# EAGLE board Light Sensors Gus (EAGLE 8.6.0)
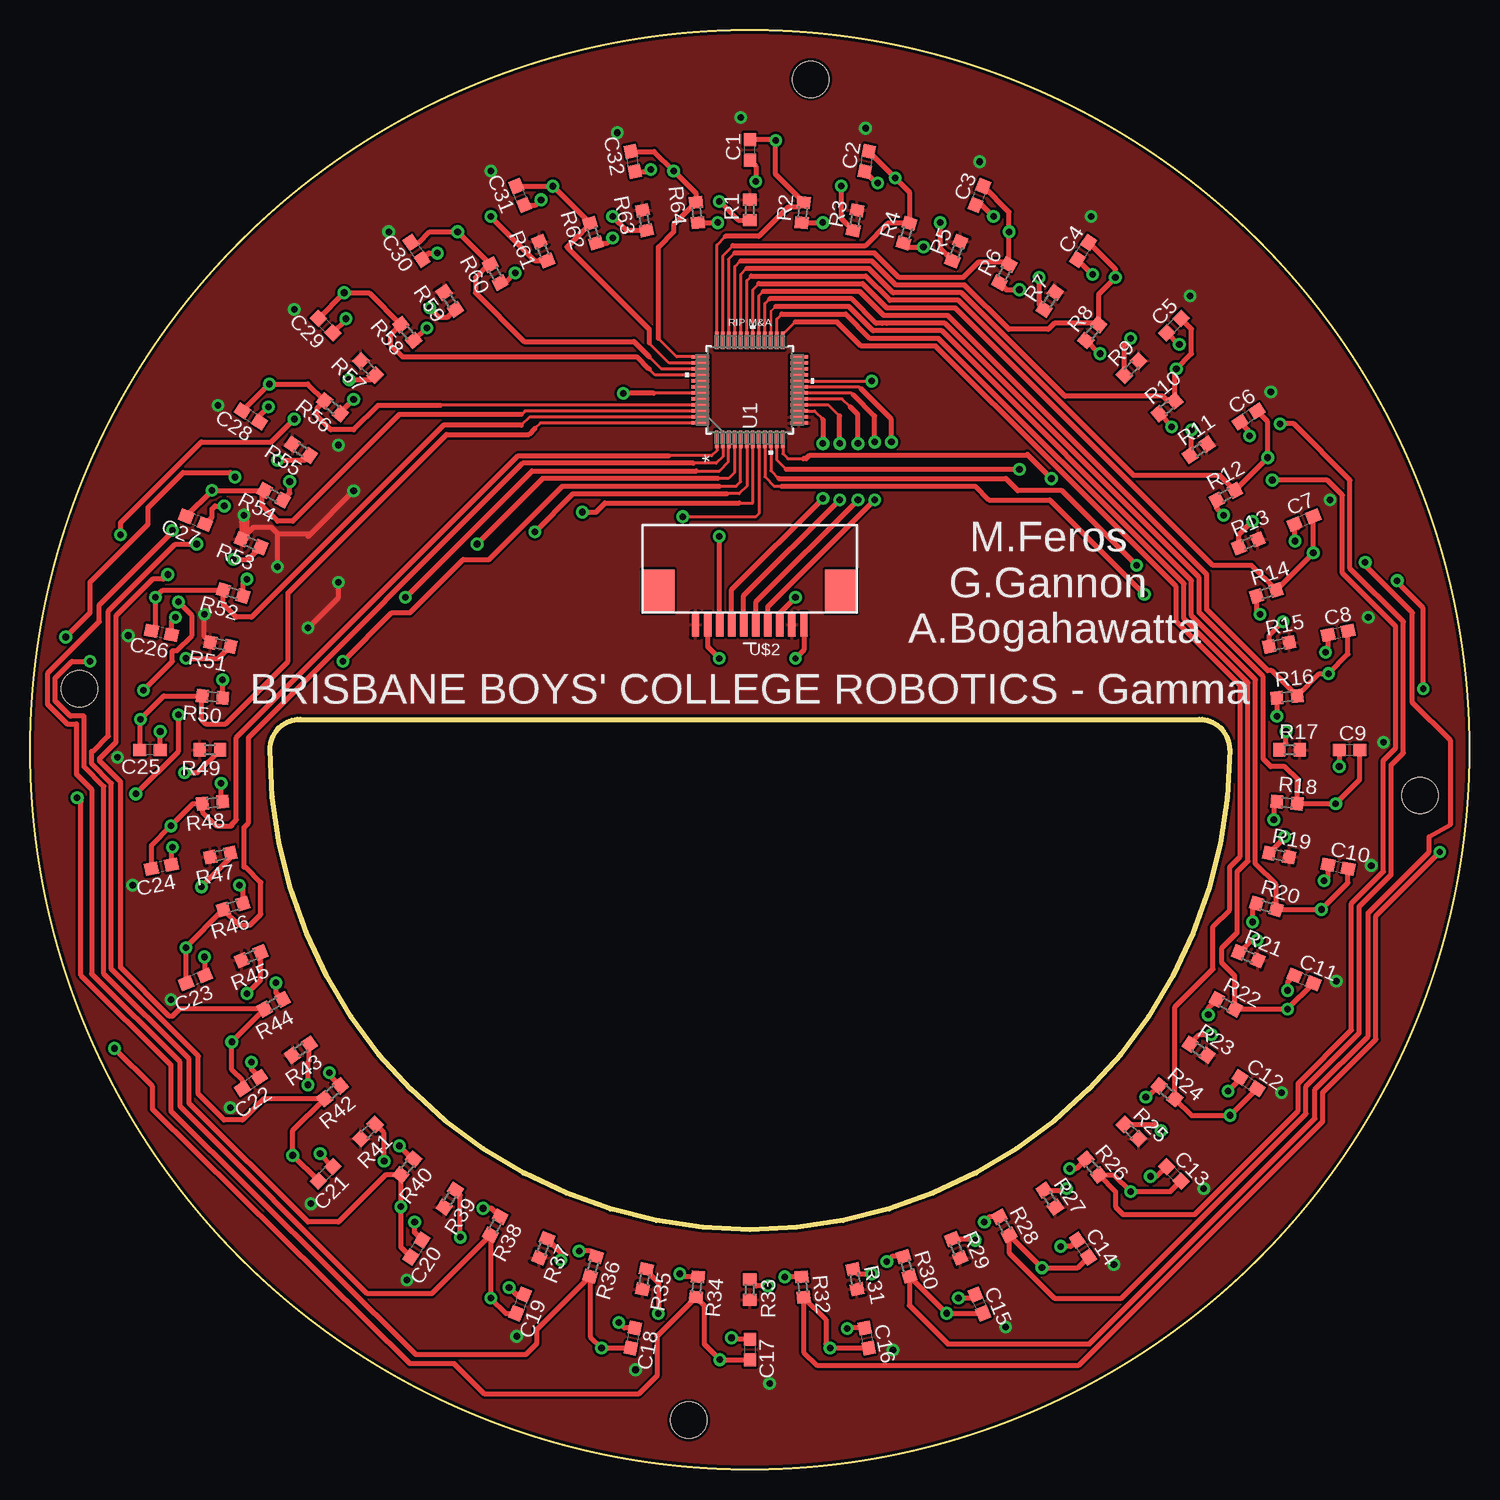
[diagram p0: board, top side]
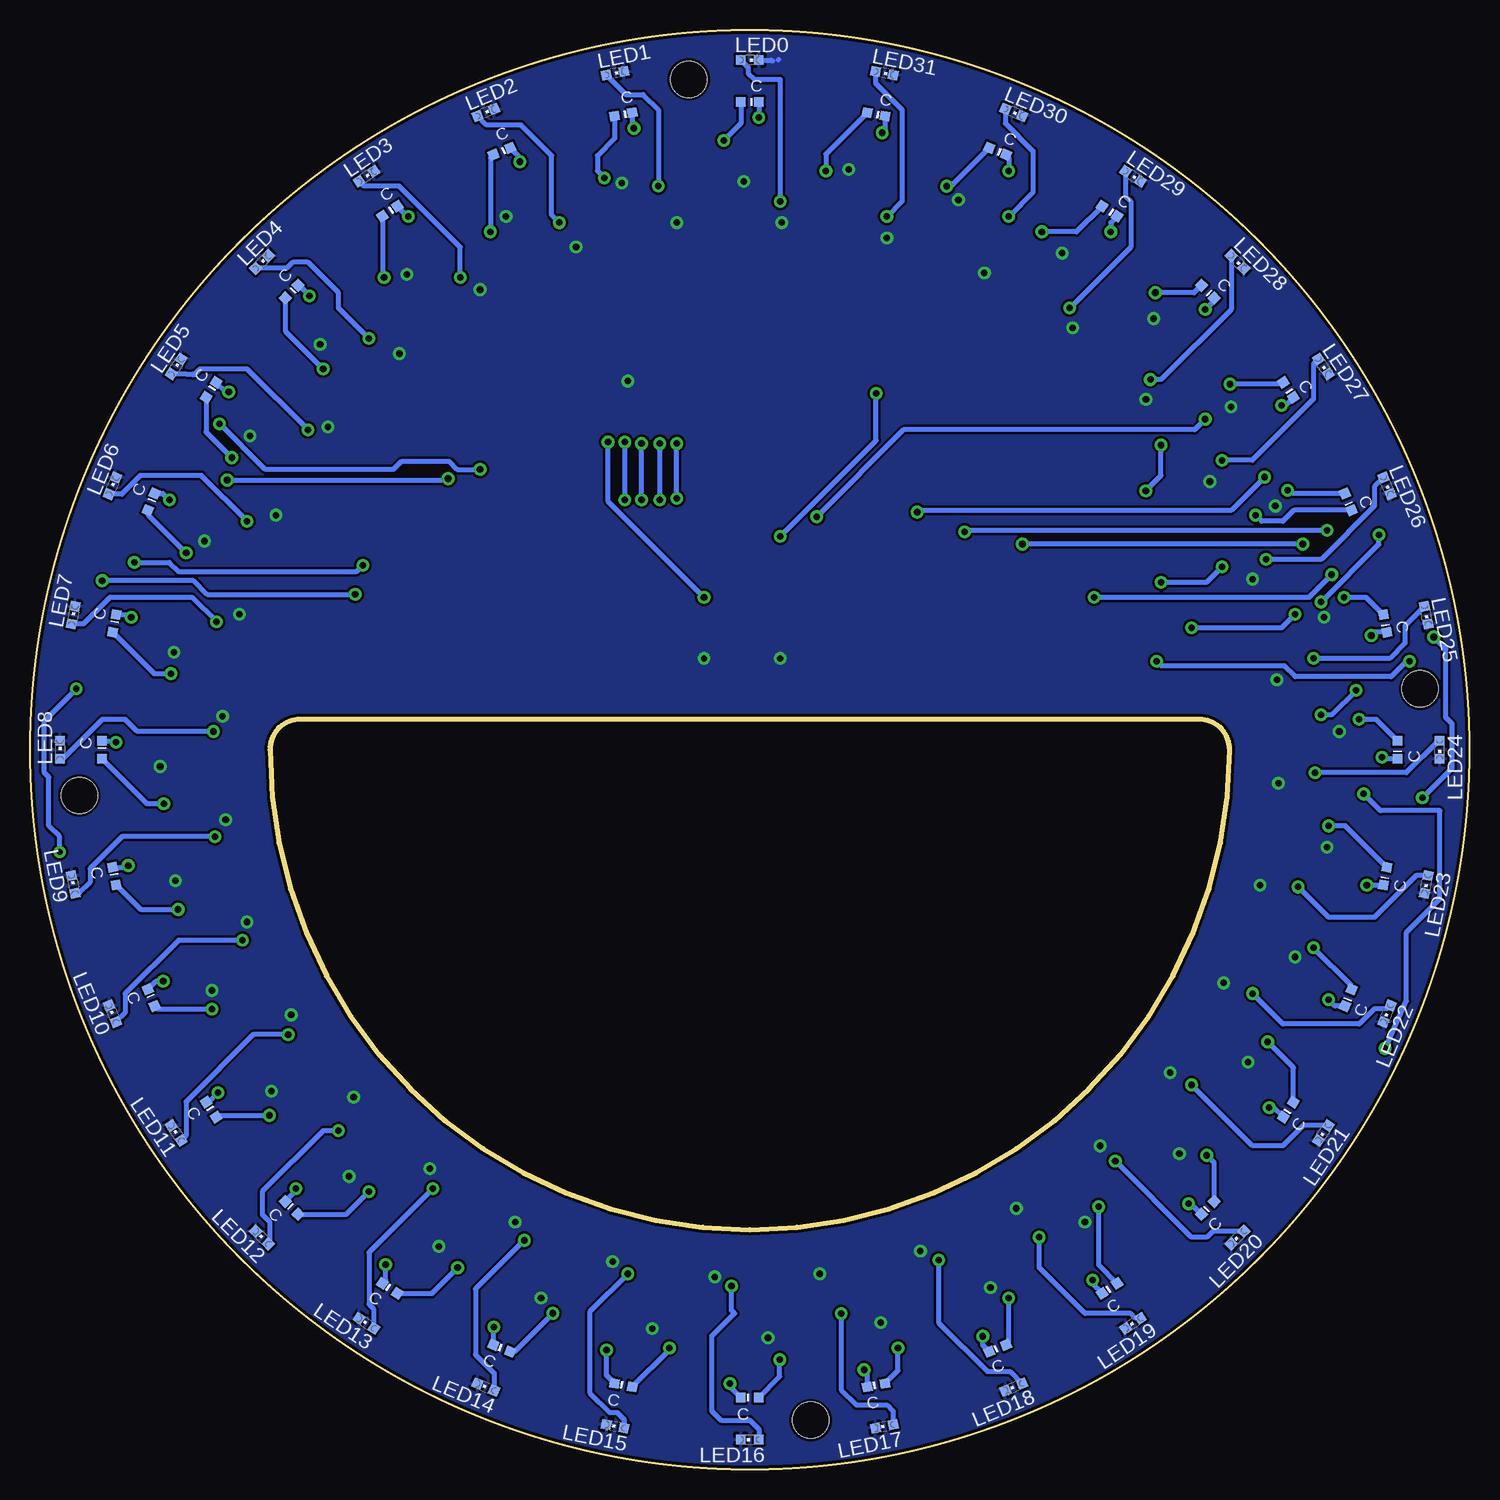
[diagram p1: board, bottom side, seen from below]

Size 120 x 120 mm. Coordinates in mm from the lower left corner, seen from the top.
Outline: 100,60 arc-180 20,60 arc-90 22.54,62.54 97.46,62.54 arc-90 100,60
Outline: circle at 60,60 radius 60
Copper layers (1*16): Top 0.035mm / dielectric 1.5mm / Bottom 0.035mm
Design rules "SparkFun": minimum track width 8mil, minimum drill 20mil, track to track 8mil, track to pad 8mil, pad to pad 8mil, via to via 8mil, smd to smd 8mil, copper to edge 10mil, drill to drill 8mil, minimum pad ring 12mil, minimum via ring 10mil, stop-mask expansion 4mil, vias tented up to drill 25mil, thermal gap 10mil
Holes 3 mm at 65.08,115.88 115.88,56.19 54.92,4.12 4.12,65.08

## Footprints (pad centres in the part's own frame; a part is rotated, then mirrored left to right if it is on the bottom)
C0603 = smd 1.1 x 1: 1 -0.85,0; 2 0.85,0
CHIPLED_0603 = smd 0.8 x 0.8: A 0,-0.75; C 0,0.75
SMD = smd 0.8 x 0.8: C -0.75,0; E 0.75,0
R0603 = smd 1 x 1.1: 1 -0.85,0; 2 0.85,0
SU_48 = smd 1.473 x 0.279: 1 -4.115,2.75; 2 -4.115,2.25; 3 -4.115,1.75; 4 -4.115,1.25; 5 -4.115,0.75; 6 -4.115,0.25; 7 -4.115,-0.25; 8 -4.115,-0.75; 9 -4.115,-1.25; 10 -4.115,-1.75; 11 -4.115,-2.25; 12 -4.115,-2.75; 25 4.115,-2.75; 26 4.115,-2.25; 27 4.115,-1.75; 28 4.115,-1.25; 29 4.115,-0.75; 30 4.115,-0.25; 31 4.115,0.25; 32 4.115,0.75; 33 4.115,1.25; 34 4.115,1.75; 35 4.115,2.25; 36 4.115,2.75 | smd 0.279 x 1.473: 13 -2.75,-4.115; 14 -2.25,-4.115; 15 -1.75,-4.115; 16 -1.25,-4.115; 17 -0.75,-4.115; 18 -0.25,-4.115; 19 0.25,-4.115; 20 0.75,-4.115; 21 1.25,-4.115; 22 1.75,-4.115; 23 2.25,-4.115; 24 2.75,-4.115; 37 2.75,4.115; 38 2.25,4.115; 39 1.75,4.115; 40 1.25,4.115; 41 0.75,4.115; 42 0.25,4.115; 43 -0.25,4.115; 44 -0.75,4.115; 45 -1.25,4.115; 46 -1.75,4.115; 47 -2.25,4.115; 48 -2.75,4.115
FPC10 = smd 0.61 x 2.007: 1 -4.515,1.003; 2 -3.512,1.003; 3 -2.508,1.003; 4 -1.505,1.003; 5 -0.502,1.003; 6 0.502,1.003; 7 1.505,1.003; 8 2.508,1.003; 9 3.512,1.003; 10 4.515,1.003 | smd 2.667 x 3.607: N/C-1 -7.62,-1.803; N/C-2 7.62,-1.803

## Placement (x,y rotation side)
C1  0.1uF  [C0603]  60,110 90 top
C2  0.1uF  [C0603]  69.75,109.04 78.8 top
C3  0.1uF  [C0603]  79.13,106.19 67.5 top
C4  0.1uF  [C0603]  87.78,101.57 56.3 top
C5  0.1uF  [C0603]  95.36,95.36 45 top
C6  0.1uF  [C0603]  101.57,87.78 33.8 top
C7  0.1uF  [C0603]  106.19,79.13 22.5 top
C8  0.1uF  [C0603]  109.04,69.75 11.3 top
C9  0.1uF  [C0603]  110,60 0 top
C10  0.1uF  [C0603]  109.04,50.25 348.8 top
C11  0.1uF  [C0603]  106.19,40.87 337.5 top
C12  0.1uF  [C0603]  101.57,32.22 326.3 top
C13  0.1uF  [C0603]  95.36,24.64 315 top
C14  0.1uF  [C0603]  87.78,18.43 303.8 top
C15  0.1uF  [C0603]  79.13,13.81 292.5 top
C16  0.1uF  [C0603]  69.75,10.96 281.3 top
C17  0.1uF  [C0603]  60,10 270 top
C18  0.1uF  [C0603]  50.25,10.96 258.8 top
C19  0.1uF  [C0603]  40.87,13.81 247.5 top
C20  0.1uF  [C0603]  32.22,18.43 236.3 top
C21  0.1uF  [C0603]  24.64,24.64 225 top
C22  0.1uF  [C0603]  18.43,32.22 213.8 top
C23  0.1uF  [C0603]  13.81,40.87 202.5 top
C24  0.1uF  [C0603]  10.96,50.25 191.3 top
C25  0.1uF  [C0603]  10,60 180 top
C26  0.1uF  [C0603]  10.96,69.75 168.8 top
C27  0.1uF  [C0603]  13.81,79.13 157.5 top
C28  0.1uF  [C0603]  18.43,87.78 146.3 top
C29  0.1uF  [C0603]  24.64,95.36 135 top
C30  0.1uF  [C0603]  32.22,101.57 123.8 top
C31  0.1uF  [C0603]  40.87,106.19 112.5 top
C32  0.1uF  [C0603]  50.25,109.04 101.3 top
LED0  [CHIPLED_0603]  60,117.5 270 bottom
LED1  [CHIPLED_0603]  71.22,116.4 281.2 bottom
LED2  [CHIPLED_0603]  82,113.12 292.5 bottom
LED3  [CHIPLED_0603]  91.95,107.81 303.7 bottom
LED4  [CHIPLED_0603]  100.66,100.66 315 bottom
LED5  [CHIPLED_0603]  107.81,91.95 326.2 bottom
LED6  [CHIPLED_0603]  113.12,82 337.5 bottom
LED7  [CHIPLED_0603]  116.4,71.22 348.7 bottom
LED8  [CHIPLED_0603]  117.5,60 0 bottom
LED9  [CHIPLED_0603]  116.4,48.78 11.2 bottom
LED10  [CHIPLED_0603]  113.12,38 22.5 bottom
LED11  [CHIPLED_0603]  107.81,28.05 33.7 bottom
LED12  [CHIPLED_0603]  100.66,19.34 45 bottom
LED13  [CHIPLED_0603]  91.95,12.19 56.2 bottom
LED14  [CHIPLED_0603]  82,6.88 67.5 bottom
LED15  [CHIPLED_0603]  71.22,3.6 78.7 bottom
LED16  [CHIPLED_0603]  60,2.5 90 bottom
LED17  [CHIPLED_0603]  48.78,3.6 101.2 bottom
LED18  [CHIPLED_0603]  38,6.88 112.5 bottom
LED19  [CHIPLED_0603]  28.05,12.19 123.7 bottom
LED20  [CHIPLED_0603]  19.34,19.34 135 bottom
LED21  [CHIPLED_0603]  12.19,28.05 146.2 bottom
LED22  [CHIPLED_0603]  6.88,38 157.5 bottom
LED23  [CHIPLED_0603]  3.6,48.78 168.7 bottom
LED24  [CHIPLED_0603]  2.5,60 180 bottom
LED25  [CHIPLED_0603]  3.6,71.22 191.2 bottom
LED26  [CHIPLED_0603]  6.88,82 202.5 bottom
LED27  [CHIPLED_0603]  12.19,91.95 213.7 bottom
LED28  [CHIPLED_0603]  19.34,100.66 225 bottom
LED29  [CHIPLED_0603]  28.05,107.81 236.2 bottom
LED30  [CHIPLED_0603]  38,113.12 247.5 bottom
LED31  [CHIPLED_0603]  48.78,116.4 258.7 bottom
LS0  ALS  [SMD]  60,114 180 bottom
LS1  ALS  [SMD]  70.53,112.96 191.2 bottom
LS2  ALS  [SMD]  80.66,109.89 202.5 bottom
LS3  ALS  [SMD]  90,104.9 213.7 bottom
LS4  ALS  [SMD]  98.18,98.18 225 bottom
LS5  ALS  [SMD]  104.9,90 236.2 bottom
LS6  ALS  [SMD]  109.89,80.66 247.5 bottom
LS7  ALS  [SMD]  112.96,70.53 258.7 bottom
LS8  ALS  [SMD]  114,60 270 bottom
LS9  ALS  [SMD]  112.96,49.47 281.2 bottom
LS10  ALS  [SMD]  109.89,39.34 292.5 bottom
LS11  ALS  [SMD]  104.9,30 303.7 bottom
LS12  ALS  [SMD]  98.18,21.82 315 bottom
LS13  ALS  [SMD]  90,15.1 326.2 bottom
LS14  ALS  [SMD]  80.66,10.11 337.5 bottom
LS15  ALS  [SMD]  70.53,7.04 348.7 bottom
LS16  ALS  [SMD]  60,6 0 bottom
LS17  ALS  [SMD]  49.47,7.04 11.2 bottom
LS18  ALS  [SMD]  39.34,10.11 22.5 bottom
LS19  ALS  [SMD]  30,15.1 33.7 bottom
LS20  ALS  [SMD]  21.82,21.82 45 bottom
LS21  ALS  [SMD]  15.1,30 56.2 bottom
LS22  ALS  [SMD]  10.11,39.34 67.5 bottom
LS23  ALS  [SMD]  7.04,49.47 78.7 bottom
LS24  ALS  [SMD]  6,60 90 bottom
LS25  ALS  [SMD]  7.04,70.53 101.2 bottom
LS26  ALS  [SMD]  10.11,80.66 112.5 bottom
LS27  ALS  [SMD]  15.1,90 123.7 bottom
LS28  ALS  [SMD]  21.82,98.18 135 bottom
LS29  ALS  [SMD]  30,104.9 146.2 bottom
LS30  ALS  [SMD]  39.34,109.89 157.5 bottom
LS31  ALS  [SMD]  49.47,112.96 168.7 bottom
R1  100  [R0603]  60,105 90 top
R2  33K  [R0603]  64.41,104.78 84.4 top
R3  100  [R0603]  68.78,104.14 78.8 top
R4  33K  [R0603]  73.06,103.06 73.1 top
R5  100  [R0603]  77.22,101.57 67.5 top
R6  33K  [R0603]  81.21,99.69 61.9 top
R7  100  [R0603]  85,97.42 56.3 top
R8  33K  [R0603]  88.55,94.79 50.6 top
R9  100  [R0603]  91.82,91.82 45 top
R10  33K  [R0603]  94.79,88.55 39.4 top
R11  100  [R0603]  97.42,85 33.8 top
R12  33K  [R0603]  99.69,81.21 28.1 top
R13  100  [R0603]  101.57,77.22 22.5 top
R14  33K  [R0603]  103.06,73.06 16.9 top
R15  100  [R0603]  104.14,68.78 11.3 top
R16  33K  [R0603]  104.78,64.41 5.6 top
R17  100  [R0603]  105,60 0 top
R18  33K  [R0603]  104.78,55.59 354.4 top
R19  100  [R0603]  104.14,51.22 348.8 top
R20  33K  [R0603]  103.06,46.94 343.1 top
R21  100  [R0603]  101.57,42.78 337.5 top
R22  33K  [R0603]  99.69,38.79 331.9 top
R23  100  [R0603]  97.42,35 326.3 top
R24  33K  [R0603]  94.79,31.45 320.6 top
R25  100  [R0603]  91.82,28.18 315 top
R26  33K  [R0603]  88.55,25.21 309.4 top
R27  100  [R0603]  85,22.58 303.8 top
R28  33K  [R0603]  81.21,20.31 298.1 top
R29  100  [R0603]  77.22,18.43 292.5 top
R30  33K  [R0603]  73.06,16.94 286.9 top
R31  100  [R0603]  68.78,15.86 281.3 top
R32  33K  [R0603]  64.41,15.22 275.6 top
R33  100  [R0603]  60,15 270 top
R34  33K  [R0603]  55.59,15.22 264.4 top
R35  100  [R0603]  51.22,15.86 258.8 top
R36  33K  [R0603]  46.94,16.94 253.1 top
R37  100  [R0603]  42.78,18.43 247.5 top
R38  33K  [R0603]  38.79,20.31 241.9 top
R39  100  [R0603]  35,22.58 236.3 top
R40  33K  [R0603]  31.45,25.21 230.6 top
R41  100  [R0603]  28.18,28.18 225 top
R42  33K  [R0603]  25.21,31.45 219.4 top
R43  100  [R0603]  22.58,35 213.8 top
R44  33K  [R0603]  20.31,38.79 208.1 top
R45  100  [R0603]  18.43,42.78 202.5 top
R46  33K  [R0603]  16.94,46.94 196.9 top
R47  100  [R0603]  15.86,51.22 191.3 top
R48  33K  [R0603]  15.22,55.59 185.6 top
R49  100  [R0603]  15,60 180 top
R50  33K  [R0603]  15.22,64.41 174.4 top
R51  100  [R0603]  15.86,68.78 168.8 top
R52  33K  [R0603]  16.94,73.06 163.1 top
R53  100  [R0603]  18.43,77.22 157.5 top
R54  33K  [R0603]  20.31,81.21 151.9 top
R55  100  [R0603]  22.58,85 146.3 top
R56  33K  [R0603]  25.21,88.55 140.6 top
R57  100  [R0603]  28.18,91.82 135 top
R58  33K  [R0603]  31.45,94.79 129.4 top
R59  100  [R0603]  35,97.42 123.8 top
R60  33K  [R0603]  38.79,99.69 118.1 top
R61  100  [R0603]  42.78,101.57 112.5 top
R62  33K  [R0603]  46.94,103.06 106.9 top
R63  100  [R0603]  51.22,104.14 101.3 top
R64  33K  [R0603]  55.59,104.78 95.6 top
U1  ADG732BSUZ-REEL  [SU_48]  60,90 90 top
U$2  FPC10  [FPC10]  60,71.43 180 top

## Library data of the parts
C1-C32 LED0 LED1-LED31 R1-R64 = adafruit
LS0 LS1-LS31 = phototransitor-ALS-PT19-315CL177TR8
U1 = ADG732; MANUFACTURER_PART_NUMBER: ADG732BSUZREEL; VENDOR: Analog Devices Inc
U$2 = FFC

## Nets
+3V3: LS0.C LS1.C LS2.C LS3.C LS4.C LS5.C LS6.C LS7.C LS8.C LS9.C LS10.C LS11.C LS12.C LS13.C LS14.C LS15.C LS16.C LS17.C LS18.C LS19.C LS20.C LS21.C LS22.C LS23.C LS24.C LS25.C LS26.C LS27.C LS28.C LS29.C LS30.C LS31.C R1.2 R3.2 R5.2 R7.2 R9.2 R11.2 R13.2 R15.2 R17.2 R19.2 R21.2 R23.2 R25.2 R27.2 R29.2 R31.2 R33.2 R35.2 R37.2 R39.2 R41.2 R43.2 R45.2 R47.2 R49.2 R51.2 R53.2 R55.2 R57.2 R59.2 R61.2 R63.2 U1.13 U1.14 U$2.2 U$2.10
CONTROL1: U1.19 U$2.3
CONTROL2: U1.18 U$2.4
CONTROL3: U1.17 U$2.5
CONTROL4: U1.16 U$2.6
CONTROL5: U1.15 U$2.7
GND: C1.1 C2.1 C3.1 C4.1 C5.1 C6.1 C7.1 C8.1 C9.1 C10.1 C11.1 C12.1 C13.1 C14.1 C15.1 C16.1 C17.1 C18.1 C19.1 C20.1 C21.1 C22.1 C23.1 C24.1 C25.1 C26.1 C27.1 C28.1 C29.1 C30.1 C31.1 C32.1 LED0.C LED1.C LED2.C LED3.C LED4.C LED5.C LED6.C LED7.C LED8.C LED9.C LED10.C LED11.C LED12.C LED13.C LED14.C LED15.C LED16.C LED17.C LED18.C LED19.C LED20.C LED21.C LED22.C LED23.C LED24.C LED25.C LED26.C LED27.C LED28.C LED29.C LED30.C LED31.C R2.1 R4.1 R6.1 R8.1 R10.1 R12.1 R14.1 R16.1 R18.1 R20.1 R22.1 R24.1 R26.1 R28.1 R30.1 R32.1 R34.1 R36.1 R38.1 R40.1 R42.1 R44.1 R46.1 R48.1 R50.1 R52.1 R54.1 R56.1 R58.1 R60.1 R62.1 R64.1 U1.20 U1.21 U1.22 U1.23 U1.24 U$2.1 U$2.9
LS0: C1.2 LS0.E R2.2 U1.36
LS1: C2.2 LS1.E R4.2 U1.35
LS2: C3.2 LS2.E R6.2 U1.34
LS3: C4.2 LS3.E R8.2 U1.33
LS4: C5.2 LS4.E R10.2 U1.32
LS5: C6.2 LS5.E R12.2 U1.31
LS6: C7.2 LS6.E R14.2 U1.30
LS7: C8.2 LS7.E R16.2 U1.29
LS8: C9.2 LS8.E R18.2 U1.28
LS9: C10.2 LS9.E R20.2 U1.27
LS10: C11.2 LS10.E R22.2 U1.26
LS11: C12.2 LS11.E R24.2 U1.25
LS12: C13.2 LS12.E R26.2 U1.12
LS13: C14.2 LS13.E R28.2 U1.11
LS14: C15.2 LS14.E R30.2 U1.10
LS15: C16.2 LS15.E R32.2 U1.9
LS16: C17.2 LS16.E R34.2 U1.8
LS17: C18.2 LS17.E R36.2 U1.7
LS18: C19.2 LS18.E R38.2 U1.6
LS19: C20.2 LS19.E R40.2 U1.5
LS20: C21.2 LS20.E R42.2 U1.4
LS21: C22.2 LS21.E R44.2 U1.3
LS22: C23.2 LS22.E R46.2 U1.2
LS23: C24.2 LS23.E R48.2 U1.1
LS24: C25.2 LS24.E R50.2 U1.48
LS25: C26.2 LS25.E R52.2 U1.47
LS26: C27.2 LS26.E R54.2 U1.46
LS27: C28.2 LS27.E R56.2 U1.45
LS28: C29.2 LS28.E R58.2 U1.40
LS29: C30.2 LS29.E R60.2 U1.39
LS30: C31.2 LS30.E R62.2 U1.38
LS31: C32.2 LS31.E R64.2 U1.37
N$1: LED0.A R1.1
N$2: LED1.A R3.1
N$3: LED2.A R5.1
N$4: LED3.A R7.1
N$5: LED4.A R9.1
N$6: LED5.A R11.1
N$7: LED6.A R13.1
N$8: LED7.A R15.1
N$9: LED8.A R17.1
N$10: LED9.A R19.1
N$11: LED10.A R21.1
N$12: LED11.A R23.1
N$13: LED12.A R25.1
N$14: LED13.A R27.1
N$15: LED14.A R29.1
N$16: LED15.A R31.1
N$17: LED16.A R33.1
N$18: LED17.A R35.1
N$19: LED18.A R37.1
N$20: LED19.A R39.1
N$21: LED20.A R41.1
N$22: LED21.A R43.1
N$23: LED22.A R45.1
N$24: LED23.A R47.1
N$25: LED24.A R49.1
N$26: LED25.A R51.1
N$27: LED26.A R53.1
N$28: LED27.A R55.1
N$29: LED28.A R57.1
N$30: LED29.A R59.1
N$31: LED30.A R61.1
N$32: LED31.A R63.1
OUTPUT: U1.43 U$2.8

## Tracks (layer width: path | path; a pad name or v marks a point on that pad's centre or on a via)
+3V3  (via drill 0.55, 0.55 pad 0.95)
  Top 0.406: R1.2 | R53.2 18.09,78 18.09,79.05 | 17.64,78.99 R53.2 | R53.2 17.87,77.78 | 23.17,77.78 23.42,78.03 | 23.42,78.03 v26.98,81.59 | R53.2 18.64,78.54 20.12,78.54 20.63,78.03 | 20.63,78.03 23.42,78.03 | R51.2 14.53,69.44 v14.53,71.3 | v23.17,70.16 25.71,72.7 v25.71,73.97 | v20.63,75.24 20.63,78.03
  Bottom 0.406: LS0.C 59.24,113.99 v59.24,112.7 | LS1.C 69.8,111.96 v69.65,111.82 | LS2.C 79.18,109.38 v79.18,109.02 | LS3.C 88.51,104.45 v88.45,104.45 | LS4.C 97.57,98.71 v96.7,97.85 | LS5.C 103.7,89.84 v103.43,89.84 | LS6.C 108.92,81.36 v108.39,80.83 | LS7.C 111.78,71.27 v111.56,71.05 | LS8.C 112.95,60.75 v112.83,60.63 | LS9.C 111.96,50.2 v111.82,50.35 | LS10.C 109.51,40.7 v108.9,40.7 | LS11.C 105.12,30.62 v104.32,31.43 | LS12.C 97.85,23.22 v97.85,23.42 | LS13.C 90.35,15.79 v90.35,17.07 | LS14.C 81.36,11.84 v81.34,11.87 | LS15.C 71.94,7.85 v71.94,9.96 | LS16.C 61.65,6.9 v61.65,7.17 | LS17.C 50.2,8.04 v50.48,8.31 | LS18.C 40.57,10.36 v40.57,11.1 | LS19.C 31.43,15.49 v31.43,15.8 | LS20.C 23.22,22.15 v23.42,22.15 | LS21.C 16.3,30.16 v16.69,30.16 | LS22.C 11.21,38.64 v11.74,39.17 | LS23.C 7.22,48.7 v8.56,48.7 | LS24.C 7.18,59.25 v7.3,59.37 | LS25.C 7.91,69.8 v8.18,69.53 | LS27.C 15.36,88.7 v15.68,88.7 | LS28.C 21.29,97.44 v22.03,96.7 | LS29.C 29.9,103.96 v29.9,103.18 | LS30.C 38.41,109.37 v38.41,108.26 | LS31.C 48.73,111.66 v48.95,111.44 | LS26.C 14.63,79.97 15.55,79.05 17.33,79.05 v17.84,79.56 | v26.98,81.59 25.71,82.86 v25.71,85.4 | v14.53,71.3 15.68,70.16 v23.17,70.16 | v25.71,73.97 21.9,73.97 v20.63,75.24
  pour Top: 100.64,112.07 89.21,123.5 71.43,123.5 35.87,123.5 30.79,118.42 25.71,118.42 9.2,101.91 4.12,96.83 4.12,93.02 -3.5,85.4 -3.5,67.62 -3.5,43.49 1.58,38.41 1.58,29.52 10.47,20.63 25.71,5.39 28.25,5.39 35.87,-2.23 53.65,-2.23 81.59,-2.23 82.86,-0.96 86.67,-0.96 96.83,9.2 98.1,9.2 112.07,23.17 119.69,30.79 119.69,39.68 122.23,42.22 122.23,56.19 122.23,79.05 117.15,84.13 117.15,91.75 106.99,101.91 106.99,105.72
CONTROL1  (via drill 0.55)
  Top 0.254: 69.27,90.1 69.12,90.25 U1.19
  Top 0.406: v63.81,72.7 62.48,71.37 62.48,70.46 U$2.3 | v71.81,85.65 71.81,87.56 69.27,90.1
  Bottom 0.406: v63.81,72.7 71.81,80.7 v71.81,85.65
CONTROL2  (via drill 0.55)
  Top 0.254: 68.64,89.59 68.48,89.75 U1.18
  Top 0.406: v70.41,80.83 61.49,71.9 61.49,70.45 U$2.4 | v70.41,85.65 70.41,87.81 68.64,89.59
  Bottom 0.406: v70.41,80.83 v70.41,85.65
CONTROL3  (via drill 0.55)
  Top 0.254: 68.38,88.58 67.71,89.25 U1.17
  Top 0.406: v69.02,80.83 60.49,72.31 U$2.5 | v69.02,85.53 69.02,87.94 68.38,88.58
  Bottom 0.406: v69.02,80.83 v69.02,85.53
CONTROL4  (via drill 0.55)
  Top 0.254: 67.49,87.81 66.56,88.75 U1.16
  Top 0.406: v67.49,85.53 67.49,87.81 | U$2.6 59.5,72.83 v67.49,80.83
  Bottom 0.406: v67.49,80.83 v67.49,85.53
CONTROL5  (via drill 0.55)
  Top 0.254: U1.15 65.41,88.25 66.1,87.56
  Top 0.406: 66.1,87.56 v66.1,85.53 | U$2.7 58.49,73.35 v66.1,80.95
  Bottom 0.406: v66.1,80.95 v66.1,85.53
GND  (via drill 0.51, 0.55, 0.55 pad 0.95)
  Top 0.254: v70.16,90.73 70.14,90.75 U1.20 U1.22 | U1.24 U1.22 | U1.23 U1.22 | U1.21 U1.22
  Top 0.406: C1.1 60.51,108.64 v60.51,107.37 | 64.45,103.81 R2.1 v66.09,103.94 v66.1,103.94 | C2.1 70.55,107.24 v70.67,107.24 | 80.81,98.88 R6.1 81.39,98.35 v82.48,98.35 | 88.1,94.13 R8.1 89.12,93.02 v89.21,93.02 | R4.1 73.16,101.91 v74.48,101.91 | C3.1 79.36,105.41 v80.32,104.45 | C4.1 88.55,99.62 v88.58,99.62 | R64.1 v57.33,103.94 | C5.1 95.73,93.78 v95.81,93.78 | R10.1 95.18,86.96 v95.18,86.92 | C6.1 101.66,86.52 v101.66,86.16 | R12.1 98.94,80.12 v99.5,79.56 | 105.72,78.5 C7.1 105.41,77.46 v105.47,77.4 | C8.1 108.21,68.33 v108.01,68.13 | R16.1 v103.94,62.8 v103.94,62.79 | C9.1 v109.15,58.6 | R18.1 103.69,55.42 v103.69,54.16 | C10.1 108.2,49.4 v107.88,49.08 | R20.1 101.91,46.84 v101.91,45.65 | C11.1 104.83,40.61 v104.83,39.93 | R22.1 98.23,38.48 v98.23,37.9 | C12.1 100.87,32.54 v99.88,31.55 | R24.1 93.18,31.04 v93.02,31.04 | C13.1 93.95,24.44 v93.4,24.44 | R26.1 87.21,25.08 v86.67,25.08 | C14.1 86.77,18.6 v85.91,18.6 | R28.1 79.99,21.06 v79.56,20.63 | C15.1 78.5,14.28 v77.4,14.28 | R30.1 71.85,17.75 v71.43,17.33 | C16.1 68.18,11.79 v68.13,11.74 | R32.1 v62.93,16.06 v62.92,16.06 | C17.1 58.6,10.85 v58.48,10.98 | R34.1 54.41,16.06 v54.16,16.31 | C18.1 49.53,11.8 v49.08,12.25 | R36.1 46.72,18.22 v45.78,18.22 | C19.1 40.51,14.59 v39.93,15.17 | R38.1 38.48,21.77 v37.77,21.77 | 32.41,19.13 C20.1 32.06,19.77 v32.06,20.63 | R40.1 31.9,25.87 v30.79,26.98 | C21.1 24.19,26.3 v24.19,26.34 | R42.1 24.95,32.91 v24.95,33.08 | C22.1 18.47,33.36 v18.47,33.97 | R44.1 20.5,39.75 v20.5,40.57 | C23.1 14.59,42.67 v14.53,42.73 | R46.1 17.75,48.4 v17.45,48.7 | C24.1 11.79,51.8 v11.87,51.87 | R48.1 15.93,55.8 v15.93,57.21 | R50.1 v16.06,65.84 | C26.1 11.8,70.72 v12.12,71.05
  Top 0.406: R52.1 17.75,73.89 v18.09,74.22 | C27.1 15.17,79.39 15.17,80.07 15.42,80.32 v16.19,80.32 | R54.1 21.65,81.39 v21.65,82.35 | C28.1 19.13,87.84 v19.87,88.58 | R56.1 25.87,88.1 v26.98,89.21 | C29.1 26.34,95.85 v26.34,95.94 | R58.1 33.04,95.18 v33.08,95.18 | C30.1 33.23,101.4 v33.97,101.4 | R60.1 39.63,98.94 v40.44,99.75 | C31.1 42.16,105.41 v42.6,105.85 | R62.1 48.15,102.25 v48.57,102.67 | C32.1 51.56,108.21 v51.74,108.39 | R14.1 102.25,71.6 v102.55,71.3 | C25.1 v10.85,61.52 | U$2.9 56.49,68.59 v57.46,67.62 | U$2.1 64.52,68.33 v63.81,67.62
  Bottom 0.406: LED0.C 58.19,117.5 58.09,117.4 | 57.62,117.5 57.59,117.53
  pour Bottom: 18.09,114.61 2.85,99.37 2.85,93.02 -3.5,86.67 -3.5,67.62 -3.5,43.49 -0.96,40.95 -0.96,34.6 6.66,26.98 19.36,14.28 28.25,5.39 28.25,4.12 33.33,-0.96 42.22,-0.96 44.76,-3.5 57.46,-3.5 77.78,-3.5 82.86,1.58 91.75,1.58 103.18,13.01 115.88,25.71 120.96,30.79 120.96,42.22 123.5,44.76 123.5,63.81 123.5,82.86 115.88,90.48 115.88,94.29 104.45,105.72 91.75,118.42 87.94,118.42 84.13,122.23 71.43,122.23 58.73,122.23 57.46,123.5 26.98,123.5
LS0  (via drill 0.55 pad 0.95)
  Top 0.254: U1.36 57.25,102.08 57.97,102.8
  Top 0.406: C1.2 62.11,110.85 v62.16,110.8 62.16,107.96 R2.2 64.08,105.21 63.17,105.21 60.76,102.8 57.97,102.8
  Bottom 0.406: LS0.E 60.75,112.21 v62.16,110.8
LS1  (via drill 0.55 pad 0.95)
  Top 0.254: U1.35 57.75,101.18 58.6,102.04
  Top 0.406: C2.2 v72.12,107.68 73.31,106.48 R4.2 71.49,103.88 69.65,102.04 58.6,102.04
  Bottom 0.406: LS1.E 71.27,110.96 72.7,109.53 72.7,108.26 v72.12,107.68
LS2  (via drill 0.55 pad 0.95)
  Top 0.254: 58.73,101.4 58.22,100.89 58.22,94.14 U1.34
  Top 0.406: C3.2 81.61,104.83 v81.61,103.18 R6.2 81.41,100.64 79.05,100.64 77.78,99.37 72.45,99.37 70.41,101.4 58.73,101.4
  Bottom 0.406: LS2.E 81.61,109.35 v81.61,103.18
LS3  (via drill 0.55 pad 0.95)
  Top 0.254: U1.33 58.75,100.28 59.24,100.77
  Top 0.406: C4.2 90.48,100.05 v90.48,99.37 89.09,97.98 R8.2 88.97,95.56 85.4,95.56 84.89,95.05 81.59,95.05 77.91,98.73 72.19,98.73 70.16,100.77 59.24,100.77
  Bottom 0.406: LS3.E 90.62,99.52 v90.48,99.37
LS4  (via drill 0.55 pad 0.95)
  Top 0.254: U1.32 59.25,99.64 59.75,100.13
  Top 0.406: C5.2 96.83,95.08 96.83,93.02 v95.56,91.75 95.44,91.63 R10.2 94.79,89.09 94.42,89.46 86.29,89.46 77.65,98.1 71.94,98.1 69.91,100.13 59.75,100.13
  Bottom 0.406: LS4.E 98.71,94.9 v95.56,91.75
LS5  (via drill 0.55 pad 0.95)
  Top 0.254: U1.31 59.75,99.12 60.13,99.5
  Top 0.406: C6.2 103.18,87.35 v103.18,84.36 R12.2 99.19,82.86 92,82.86 77.4,97.47 71.68,97.47 69.65,99.5 60.13,99.5
  Bottom 0.406: LS5.E 105.32,86.49 v103.18,84.36
LS6  (via drill 0.55 pad 0.95)
  Top 0.254: U1.30 60.25,98.35 60.76,98.86
  Top 0.406: C7.2 v106.98,76.41 R14.2 101.82,75.37 98.61,75.37 77.14,96.83 71.43,96.83 69.4,98.86 60.76,98.86
  Bottom 0.406: LS6.E 110.18,79.61 v106.98,76.41
LS7  (via drill 0.55 pad 0.95)
  Top 0.254: U1.29 60.75,97.83 61.14,98.23
  Top 0.406: C8.2 109.87,67.96 v108.26,66.35 107.49,66.35 R16.2 103.52,66.6 103.18,66.6 98.1,71.68 98.1,74.61 76.51,96.19 71.18,96.19 69.14,98.23 61.14,98.23
  Bottom 0.406: LS7.E 109.66,66.35 v108.26,66.35
LS8  (via drill 0.55 pad 0.95)
  Top 0.254: U1.28 61.25,97.19 61.65,97.59
  Top 0.406: C9.2 110.85,57.51 v108.85,55.51 R18.2 105.63,57.37 105.72,57.46 104.58,58.6 103.43,58.6 102.8,59.24 102.8,66.1 97.47,71.43 97.47,74.35 76.26,95.56 71.43,95.56 71.05,95.56 70.54,95.56 68.51,97.59 61.65,97.59
  Bottom 0.406: LS8.E 110.26,55.51 v108.85,55.51
LS9  (via drill 0.55 pad 0.95)
  Top 0.203: U1.27 61.75,96.55 62.16,96.96
  Top 0.406: C10.2 109.87,48.91 v107.65,46.69 R20.2 103.88,48.76 102.16,50.48 102.16,65.84 96.83,71.18 96.83,74.1 76,94.92 70.29,94.92 68.25,96.96 62.16,96.96
  Bottom 0.406: LS9.E 110.78,46.69 v107.65,46.69
LS10  (via drill 0.55 pad 0.95)
  Top 0.254: U1.26 62.25,95.91 62.67,96.32
  Top 0.406: C11.2 v104.83,38.39 R22.2 100.44,41.15 99.37,42.22 99.37,43.49 100.64,44.76 100.64,49.84 101.53,50.73 101.53,65.59 96.19,70.92 96.19,73.84 75.75,94.29 70.03,94.29 68,96.32 62.67,96.32
  Bottom 0.406: LS10.E 109.35,38.39 v104.83,38.39
LS11  (via drill 0.55 pad 0.95)
  Top 0.254: U1.25 62.75,94.63 63.81,95.69
  Top 0.406: C12.2 v100.05,29.52 96.84,29.52 R24.2 95.44,38.55 98.61,41.71 98.61,45.27 100,46.66 100,50.22 100.89,51.11 100.89,65.33 95.56,70.67 95.56,73.59 85.21,83.94 75.49,93.66 69.27,93.66 67.24,95.69 63.81,95.69
  Bottom 0.406: LS11.E 104.34,29.52 v100.05,29.52
LS12  (via drill 0.55, 0.55 pad 0.95)
  Top 0.254: U1.12 62.75,84.68 63.17,84.26 64.7,84.26
  Top 0.406: C13.2 95.08,23.17 v91.75,23.17 90.36,24.56 R26.2 90.48,23.16 90.48,21.9 91.11,21.27 97.08,21.27 105.72,29.9 105.72,32.19 110.16,36.63 110.16,47.17 112.83,49.84 112.83,59.11 113.85,60.13 113.85,70.29 109.4,74.73 109.4,81.21 108.13,82.48 v103.56,82.48 | v85.15,82.61 83.24,84.51 | 83.24,84.51 83.11,84.64 | 64.44,84.26 64.7,84.26 64.95,84.51 83.24,84.51
  Bottom 0.406: LS12.E 93.63,21.29 v91.75,23.17 | v103.56,82.48 85.27,82.48 v85.15,82.61
LS13  (via drill 0.55, 0.55 pad 0.95)
  Top 0.254: 63.05,83.37 62.25,84.17 U1.11
  Top 0.406: C14.2 87.35,16.82 v84.36,16.82 R28.2 81.61,18.07 85.4,14.28 90.99,14.28 106.35,29.65 106.35,31.93 110.8,36.38 110.8,46.92 113.47,49.59 113.47,58.73 114.48,59.75 114.48,70.67 110.04,75.11 110.04,82.48 105.34,87.18 v104.2,87.18 | v82.48,83.37 63.05,83.37
  Bottom 0.406: LS13.E 86.49,14.68 v84.36,16.82 | v104.2,87.18 100.39,83.37 89.72,83.37 89.08,84 85.02,84 84.38,83.37 v82.48,83.37
LS14  (via drill 0.55, 0.55 pad 0.95)
  Top 0.254: U1.10 61.75,83.27 62.41,82.61
  Top 0.406: C15.2 v76.41,13.02 R30.2 73.31,13.67 76.51,10.47 88.32,10.47 107.12,29.27 107.12,31.68 111.56,36.12 111.56,46.41 116.64,51.49 116.64,52.76 118.42,53.78 118.42,60.76 115.25,63.94 115.25,71.43 111.31,75.37 v111.31,75.62 | v92.26,75.37 86.03,81.59 82.35,81.59 81.34,82.61 62.41,82.61
  Bottom 0.406: LS14.E 79.61,9.82 v76.41,13.02 | v111.31,75.62 108.39,75.62 107.62,74.86 92.77,74.86 v92.26,75.37
LS15  (via drill 0.51, 0.55, 0.55 pad 0.95)
  Top 0.254: U1.9 61.25,82.75 62.03,81.97 62.67,81.97
  Top 0.406: C16.2 v66.69,10.13 66.35,10.47 66.35,12.51 R32.2 64.49,9.79 65.59,8.69 87.43,8.69 107.75,29.01 107.75,31.43 112.2,35.87 112.2,46.16 v117.53,51.49 | v116.13,65.08 116.13,71.81 113.97,73.97 v113.97,74.1 | 62.67,81.97 78.8,81.97 79.94,80.83 85.02,80.83 v92.89,72.95
  Bottom 0.406: LS15.E 66.69,10 v66.69,10.13 | v92.89,72.95 105.21,72.95 106.35,74.1 v113.97,74.1 | v117.53,51.49 117.53,52.76 118.42,53.65 118.42,57.71 118.8,58.09 118.8,62.41 v116.13,65.08
LS16  (via drill 0.55, 0.55 pad 0.95)
  Top 0.254: v54.41,79.43 60.51,79.43 60.75,79.67 U1.8
  Top 0.406: C17.2 v57.51,9.15 56.19,10.47 56.19,13.69 R34.2 52.25,11.12 52.25,7.8 50.73,6.28 37.9,6.28 35.36,8.82 31.68,8.82 10.22,30.03 10.22,31.93 v7.04,35.11 | v8.82,56.32 12.38,59.87 v12.38,62.92 | v9.45,64.95 11.87,67.37 11.87,68.25 12.25,68.25 13.52,69.53 13.52,71.18 v12.38,72.32 | v7.55,77.91 7.55,78.92 14.28,85.65 20.12,85.65 v22.03,87.56
  Bottom 0.406: LS16.E 57.51,7.74 v57.51,9.15 | v7.04,35.11 5.26,39.05 5.26,44.76 2.47,47.55 2.47,54.92 7.42,54.92 v8.82,56.32 | v12.38,62.92 11.49,62.92 v9.45,64.95 | v12.38,72.32 7.55,77.14 v7.55,77.91 | v22.03,87.56 22.92,86.67 47.17,86.67 v54.41,79.43
LS17  (via drill 0.55, 0.55 pad 0.95)
  Top 0.254: 59.11,80.57 60.25,80.57 U1.7
  Top 0.406: C18.2 v47.64,10.13 46.69,11.08 R36.2 42.22,11.65 42.22,10.47 41.33,9.58 32.19,9.58 11.74,29.9 11.74,33.71 4.25,41.2 4.25,55.68 v3.93,56 | v2.98,69.4 5.01,71.43 5.01,73.97 9.84,78.8 9.84,80.19 12.76,83.11 16.69,83.11 v17.07,82.73 | v46.03,79.81 47.17,79.81 47.94,80.57 59.11,80.57
  Bottom 0.406: LS17.E 47.64,8.27 v47.64,10.13 | v2.98,69.4 1.96,68.38 1.96,62.67 1.45,62.16 1.45,58.48 v3.93,56 4.12,55.81 | v17.07,82.73 19.87,79.94 45.9,79.94 v46.03,79.81
LS18  (via drill 0.55, 0.55 pad 0.95)
  Top 0.254: U1.6 59.75,81.97 59.11,81.34 57.46,81.34
  Top 0.406: C19.2 39.67,13.02 v38.41,14.28 38.41,19.54 R38.2 33.48,14.66 28.12,14.66 12.5,30.28 12.5,33.97 5.14,41.33 5.14,56.7 3.87,57.97 3.87,62.16 3.1,62.16 1.45,63.81 1.45,66.35 5.77,70.67 5.77,72.06 11.87,78.16 v11.87,78.29 | v42.09,78.16 45.27,81.34 57.46,81.34 58.09,81.34
  Bottom 0.406: LS18.E 38.41,10.63 v38.41,14.28 | v11.87,78.29 41.97,78.29 v42.09,78.16
LS19  (via drill 0.55, 0.55 pad 0.95)
  Top 0.254: 57.46,81.97 58.86,81.97 59.24,82.35 59.24,85.87 U1.5
  Top 0.406: C20.2 30.91,18.56 v30.91,21.9 R40.2 29.64,24.56 25.71,20.63 23.17,20.63 13.26,30.54 13.26,34.22 6.15,41.33 6.15,56.95 4.5,58.6 4.5,62.79 3.36,62.79 2.09,64.06 2.09,65.97 3.48,67.37 v5.01,67.37 | v26.09,67.37 30.16,71.43 31.68,71.43 36.12,75.88 38.28,75.88 44.38,81.97 57.46,81.97
  Bottom 0.406: LS19.E 30.91,17.05 v30.91,21.9 | v5.01,67.37 5.26,67.37 6.53,66.1 14.53,66.1 15.42,66.98 25.71,66.98 v26.09,67.37
LS20  (via drill 0.55, 0.55 pad 0.95)
  Top 0.254: U1.4 58.73,85.86 58.73,83.11 58.22,82.61 57.33,82.61
  Top 0.406: C21.2 v21.9,26.19 21.9,28.25 R42.2 19.48,30.91 17.71,29.14 16.19,29.14 14.03,31.3 14.03,34.47 6.79,41.71 6.79,57.21 5.14,58.86 5.14,59.87 5.26,59.87 6.53,61.14 6.53,71.56 12.12,77.14 v13.9,77.14 | v37.27,77.14 42.73,82.61 57.33,82.61
  Bottom 0.406: LS20.E 21.29,25.57 v21.9,26.19 | v13.9,77.14 v37.27,77.14
LS21  (via drill 0.55, 0.55 pad 0.95)
  Top 0.254: 55.55,83.24 57.46,83.24 58.22,84 58.22,85.86 U1.3
  Top 0.406: C22.2 17.72,32.43 16.82,33.33 v16.82,35.64 R44.2 12.48,38.39 11.87,37.77 11.61,37.77 7.55,41.84 7.55,57.33 5.77,59.11 5.77,59.24 7.17,60.63 7.17,71.18 10.22,74.22 11.1,74.22 v11.49,74.61 | v31.3,72.7 41.84,83.24 55.55,83.24
  Bottom 0.406: LS21.E 14.68,33.51 v16.82,35.64 | v31.3,72.7 13.39,72.7 11.87,74.22 v11.49,74.61
LS22  (via drill 0.55 pad 0.95)
  Top 0.254: U1.2 57.75,84.42 57.21,83.88 55.3,83.88
  Top 0.406: C23.2 13.02,43.48 v13.01,43.49 13.01,43.58 R46.2 17.42,45.39 18.34,45.39 19.23,46.28 19.23,48.95 17.96,50.22 17.84,50.22 17.84,53.52 18.22,53.9 18.22,61.02 41.08,83.88 55.3,83.88
  Bottom 0.406: LS22.E 9.82,40.3 v13.01,43.49
LS23  (via drill 0.55 pad 0.95)
  Top 0.254: U1.1 57.25,84.94 56.83,84.51 52.38,84.51
  Top 0.406: C24.2 10.13,52.04 v11.74,53.65 13.6,55.51 R48.2 14.37,54.83 15.55,53.65 16.82,53.65 16.82,53.78 17.2,54.16 17.2,61.02 40.7,84.51 52.38,84.51 53.27,84.51
  Bottom 0.406: LS23.E 10.34,53.65 v11.74,53.65
LS24  (via drill 0.55 pad 0.95)
  Top 0.254: U1.48 42.55,87.25 42.09,86.8
  Top 0.406: C25.2 9.2,60.05 v9.2,62.54 11.15,64.49 R50.2 14.28,64.4 14.28,62.54 14.66,62.16 16.31,62.16 21.52,67.37 21.52,73.08 34.73,86.29 41.59,86.29 42.09,86.8
  Bottom 0.406: LS24.E 7.79,62.54 v9.2,62.54
LS25  (via drill 0.55 pad 0.95)
  Top 0.254: U1.47 41.65,87.75 40.95,87.05
  Top 0.406: C26.2 10.47,70.26 v10.47,72.7 11.08,73.31 R52.2 16.12,72.13 17.2,71.05 18.47,71.05 34.47,87.05 40.95,87.05
  Bottom 0.406: LS25.E 8.61,72.7 v10.47,72.7
LS26  (via drill 0.55 pad 0.95)
  Top 0.254: U1.46 41.26,88.25 40.95,87.94
  Top 0.406: C27.2 v15.17,81.61 R54.2 19.36,81.41 19.36,80.32 20.63,79.05 21.9,79.05 30.79,87.94 40.95,87.94
  Bottom 0.406: LS26.E 14.92,81.36 v15.17,81.61
LS27  (via drill 0.55 pad 0.95)
  Top 0.254: U1.45 34.27,88.75 34.22,88.7
  Top 0.406: C28.2 v19.95,90.48 23.16,90.48 R56.2 23.93,88.46 23.93,87.81 25.08,86.67 26.98,86.67 29.01,88.7 34.22,88.7
  Bottom 0.406: LS27.E 15.66,90.48 v19.95,90.48
LS28  (via drill 0.55 pad 0.95)
  Top 0.254: U1.40 52.12,91.25 51.62,91.75
  Top 0.406: C29.2 v26.19,98.1 28.25,98.1 R58.2 30.03,94.56 30.03,93.78 31.04,92.77 50.6,92.77 51.62,91.75
  Bottom 0.406: LS28.E 22.96,98.1 v26.19,98.1
LS29  (via drill 0.55 pad 0.95)
  Top 0.254: U1.39 52.63,91.75 51.62,92.77
  Top 0.406: C30.2 32.43,102.28 33.33,103.18 v35.64,103.18 R60.2 38.21,100.44 37.14,99.37 37.14,98.1 41.2,94.04 50.35,94.04 51.62,92.77
  Bottom 0.406: LS29.E 32.76,103.18 v35.64,103.18
LS30  (via drill 0.55 pad 0.95)
  Top 0.254: U1.38 53.28,92.25 51.62,93.91
  Top 0.406: C31.2 v43.59,106.98 R62.2 46.01,103.2 | 46.01,103.2 45.78,102.96 45.78,102.93 | 46.01,103.2 46.01,103.16 44.76,101.91 51.62,95.05 51.62,93.91
  Bottom 0.406: LS30.E 43.23,106.98 v43.59,106.98
LS31  (via drill 0.55 pad 0.95)
  Top 0.254: U1.37 55.87,92.77 53.9,92.77 52.38,94.29
  Top 0.406: C32.2 52.04,109.87 v53.65,108.26 55.51,106.4 R64.2 53.65,103.77 53.65,103.18 52.38,101.91 52.38,94.29
  Bottom 0.406: LS31.E 53.65,109.66 v53.65,108.26
N$1  (via drill 0.55 pad 0.95)
  Top 0.406: v57.46,105.72 59.03,104.15 R1.1
  Bottom 0.406: LED0.A 60.13,116.88 60.13,116.39 59.62,115.88 57.46,115.88 v57.46,105.72
N$2  (via drill 0.55 pad 0.95)
  Top 0.406: v67.62,106.99 67.62,104.3 R3.1
  Bottom 0.406: LED1.A 70.31,114.61 68.89,114.61 67.62,113.34 v67.62,106.99
N$3  (via drill 0.55 pad 0.95)
  Top 0.406: R5.1 75.88,101.81 v75.88,103.94
  Bottom 0.406: v75.88,103.94 76.51,104.58 76.51,109.53 79.05,112.07 81.93,112.07 LED2.A
N$4  (via drill 0.55 pad 0.95)
  Top 0.406: R7.1 84.13,97.11 v84.13,99.37
  Bottom 0.406: v84.13,99.37 84.13,101.91 89.21,106.99 92.17,106.99 LED3.A
N$5  (via drill 0.55 pad 0.95)
  Top 0.406: R9.1 91.22,93.76 v91.75,94.29
  Bottom 0.406: v91.75,94.29 94.29,96.83 94.29,98.1 96.83,100.64 98.1,100.64 98.61,100.13 LED4.A
N$6  (via drill 0.55 pad 0.95)
  Top 0.406: R11.1 96.83,84.65 v96.83,86.67
  Bottom 0.406: v96.83,86.67 101.91,91.75 105.85,91.75 106.35,91.24 106.44,91.32 106.99,91.32 LED5.A
N$7  (via drill 0.55 pad 0.95)
  Top 0.406: R13.1 100.79,77.93 v101.91,79.05
  Bottom 0.406: v101.91,79.05 105.72,82.86 110.8,82.86 112.35,81.31 LED6.A
N$8  (via drill 0.55 pad 0.95)
  Top 0.406: R15.1 103.3,69.52 v104.45,70.67
  Bottom 0.406: v104.45,70.67 106.48,72.7 113.34,72.7 115.56,70.48 LED7.A
N$9  (via drill 0.55 pad 0.95)
  Top 0.406: R17.1 104.7,60.55 v104.7,61.52
  Bottom 0.406: v104.7,61.52 111.05,61.52 112.07,62.54 113.97,62.54 117.27,59.25 LED8.A
N$10  (via drill 0.55 pad 0.95)
  Top 0.406: R19.1 104.58,52.66 v104.58,52.76
  Bottom 0.406: v104.58,52.76 112.32,52.76 114.99,50.09 114.99,48.95 115.9,48.05 LED9.A
N$11  (via drill 0.55 pad 0.95)
  Top 0.406: R21.1 101.81,44.12 v102.29,44.12
  Bottom 0.406: v102.29,44.12 107.62,44.12 112.07,39.68 112.07,38.07 LED10.A
N$12  (via drill 0.55 pad 0.95)
  Top 0.406: R23.1 97.49,36.25 v98.48,36.25
  Bottom 0.406: v98.48,36.25 101.4,36.25 106.99,30.66 106.99,27.83 LED11.A
N$13  (via drill 0.55 pad 0.95)
  Top 0.406: R25.1 93.76,28.78 v94.29,28.25
  Bottom 0.406: v94.29,28.25 95.56,28.25 100.64,23.17 100.64,21.27 100,20.63 100,18.93 LED12.A
N$14  (via drill 0.55 pad 0.95)
  Top 0.406: R27.1 86.28,23.29 v86.42,23.42
  Bottom 0.406: v86.42,23.42 91.75,18.09 91.75,13.77 91.37,13.39 91.37,11.82 LED13.A
N$15  (via drill 0.55 pad 0.95)
  Top 0.406: R29.1 78.69,19.21 v78.8,19.11
  Bottom 0.406: v78.8,19.11 82.86,15.04 82.86,9.58 81.31,8.03 LED14.A
N$16  (via drill 0.55 pad 0.95)
  Top 0.406: R31.1 69,16.31 v70.16,16.31
  Bottom 0.406: v70.16,16.31 73.34,13.14 73.34,6.41 71.68,4.76 71.05,4.76 70.48,4.19 LED15.A
N$17  (via drill 0.55)
  Top 0.406: v61.52,15.3 60.55,15.3 R33.1
  Bottom 0.406: LED16.A 59.25,3.37 60,4.12 62.41,4.12 63.17,4.88 63.17,11.1 61.27,13.01 61.52,13.26 v61.52,15.3
N$18  (via drill 0.55 pad 0.95)
  Top 0.406: R35.1 51.39,16.54 52.38,15.55 v52.38,13.01
  Bottom 0.406: v52.38,13.01 52.38,6.66 51.11,5.39 48.57,5.39 48.05,4.87 LED17.A
N$19  (via drill 0.55 pad 0.95)
  Top 0.406: R37.1 44.25,18.06 v44.25,17.45
  Bottom 0.406: v44.25,17.45 44.25,12.25 40.19,8.18 38.32,8.18 LED18.A
N$20  (via drill 0.55)
  Top 0.406: v35.87,19.36 35.87,22.89 R39.1
  Bottom 0.406: LED19.A 27.85,12.61 28.25,13.01 32.06,13.01 35.87,16.82 v35.87,19.36
N$21  (via drill 0.55)
  Top 0.406: v29.52,25.71 29.52,28.04 R41.1
  Bottom 0.406: LED20.A 21.39,19.87 21.9,19.36 23.17,19.36 v29.52,25.71
N$22  (via drill 0.55)
  Top 0.406: v23.17,32.06 23.17,33.97 23.29,34.09 R43.1
  Bottom 0.406: LED21.A 13.85,28.68 15.55,26.98 18.09,26.98 v23.17,32.06
N$23  (via drill 0.55)
  Top 0.406: v18.09,39.68 19.21,40.8 R45.1
  Bottom 0.406: LED22.A 6.87,38.41 7.93,38.41 9.2,37.14 15.55,37.14 v18.09,39.68
N$24  (via drill 0.55)
  Top 0.406: v14.28,48.57 16.7,50.99 R47.1
  Bottom 0.406: LED23.A 4.44,49.52 7.93,46.03 11.74,46.03 v14.28,48.57
N$25  (via drill 0.55)
  Top 0.406: v12.88,58.09 13.95,58.09 R49.1
  Bottom 0.406: LED24.A 2.61,60.75 5.26,58.09 v12.88,58.09
N$26  (via drill 0.55)
  Top 0.406: v13.01,67.62 15.7,67.62 R51.1
  Bottom 0.406: LED25.A 5.39,70.31 5.39,68.89 6.66,67.62 v13.01,67.62
N$27  (via drill 0.55)
  Top 0.406: v16.95,75.88 18.19,75.88 R53.1
  Bottom 0.406: LED26.A 7.93,81.93 7.93,80.32 12.38,75.88 v16.95,75.88
N$28  (via drill 0.55)
  Top 0.406: v20.63,84.13 22.89,84.13 R55.1
  Bottom 0.406: LED27.A 13.01,92.17 13.01,89.21 18.09,84.13 v20.63,84.13
N$29  (via drill 0.55)
  Top 0.406: v26.6,90.86 28.42,90.86 R57.1
  Bottom 0.406: LED28.A 19.87,96.7 25.71,90.86 v26.6,90.86
N$30  (via drill 0.55)
  Top 0.406: v33.33,96.83 34.09,96.07 34.83,96.07 R59.1
  Bottom 0.406: LED29.A 28.68,106.15 28.25,105.72 28.25,101.91 v33.33,96.83
N$31  (via drill 0.55)
  Top 0.406: v38.41,104.45 42.07,100.79 R61.1
  Bottom 0.406: LED30.A 38.69,112.22 36.38,109.91 36.38,106.48 v38.41,104.45
N$32  (via drill 0.55)
  Top 0.406: v48.57,104.45 49.72,103.3 R63.1
  Bottom 0.406: LED31.A 49.52,115.56 47.3,113.34 47.3,105.72 v48.57,104.45
OUTPUT  (via drill 0.55)
  Top 0.254: U1.43 52.03,89.75 52,89.72
  Top 0.406: v57.46,77.78 57.52,77.72 57.49,77.69 U$2.8 | 52,89.72 v49.46,89.72
  Bottom 0.406: v57.46,77.78 49.46,85.78 v49.46,89.72

## Text on the board
tPlace: RIP M&A | M.Feros / G.Gannon / A.Bogahawatta | BRISBANE BOYS' COLLEGE ROBOTICS - Gamma